# EAGLE board SchoolBot (EAGLE 9.1.0)
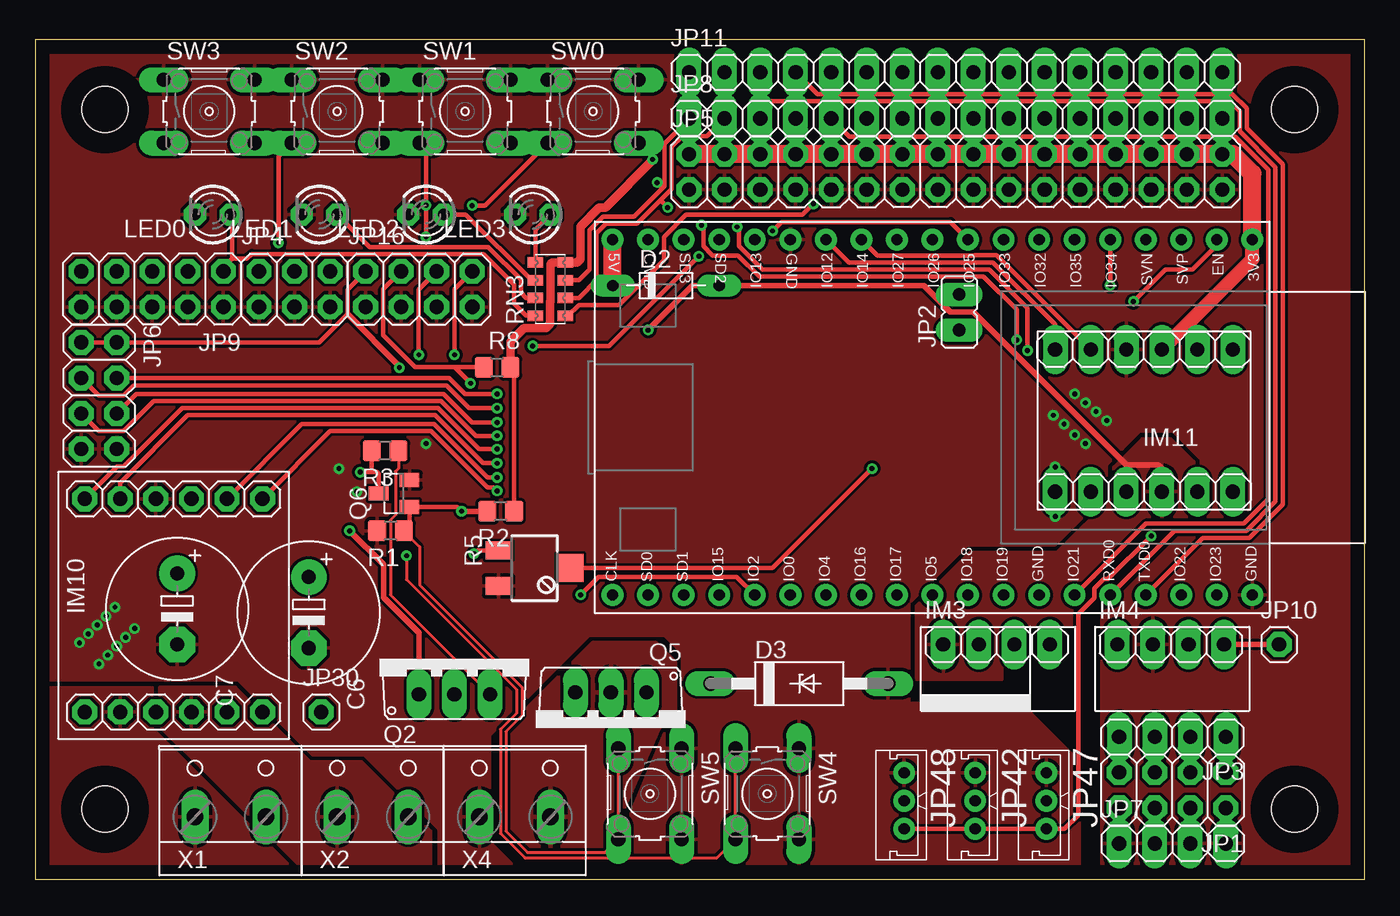
[diagram p0: board, top side]
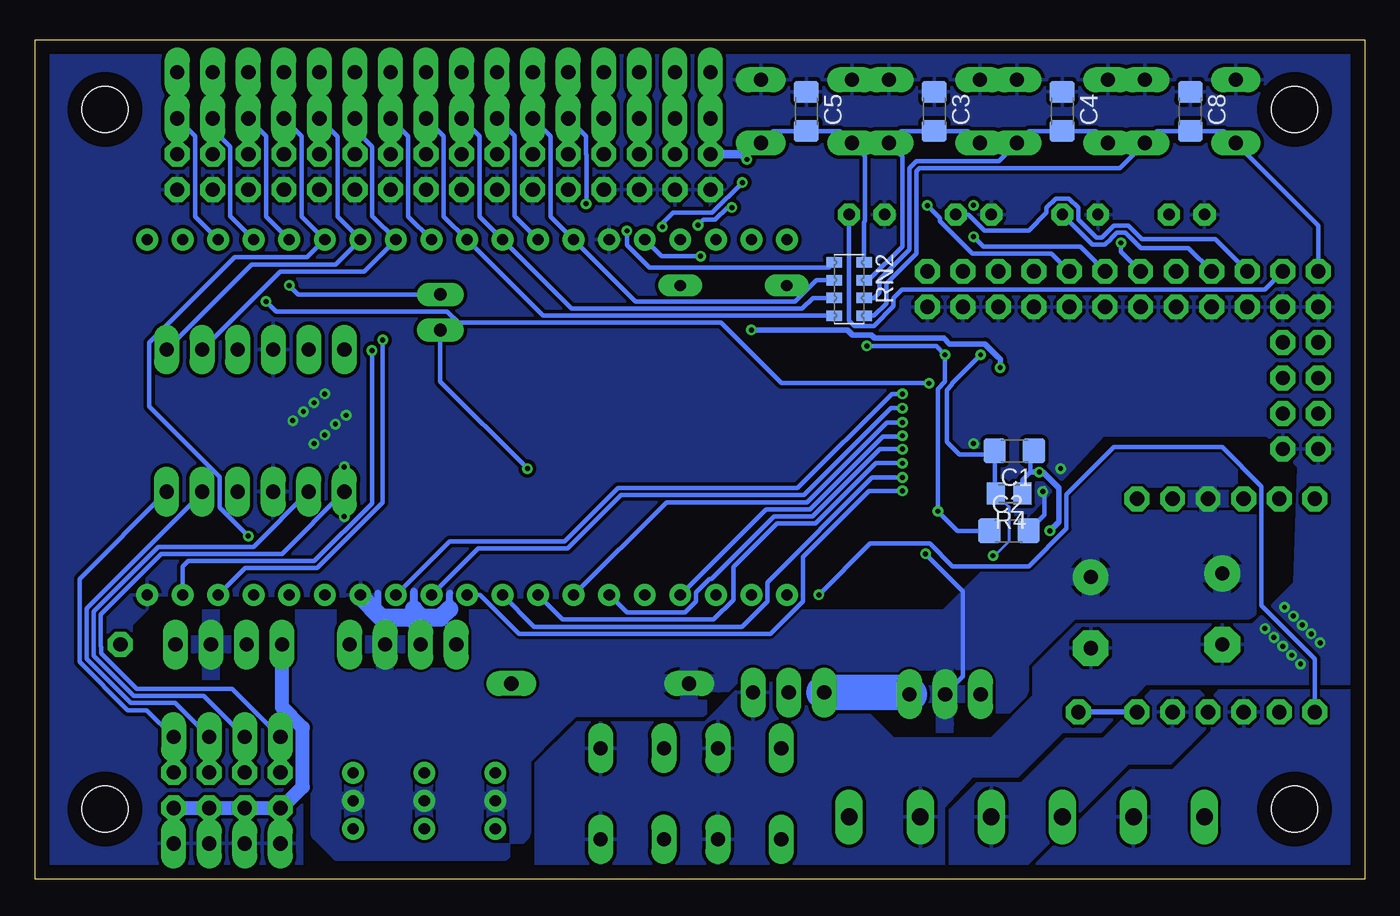
[diagram p1: board, bottom side, seen from below]

Size 95 x 60 mm. Coordinates in mm from the lower left corner, seen from the top.
Outline: 0,0 95,0 95,60 0,60 0,0
Copper layers (1*16): Top 0.035mm / dielectric 1.5mm / Bottom 0.035mm
Design rules "gatema_2layers *": minimum track width 6mil, minimum drill 0.35mm, track to track 6mil, track to pad 6mil, pad to pad 6mil, via to via 6mil, smd to smd 6mil, copper to edge 40mil, drill to drill 6mil, minimum pad ring 15mil, minimum via ring 8mil, stop-mask expansion 4mil, vias tented up to drill 0mil, thermal gap 10mil
Net classes: 0 default: width 0.2 mm, drill 0.35 mm, clearance 0.2 mm
Holes 3.3 mm at 90,5 5,5 5,55 90,55
tRestrict: area 87.4,2.4 to 92.6,7.6; area 2.4,2.4 to 7.6,7.6; area 2.4,52.4 to 7.6,57.6; area 87.4,52.4 to 92.6,57.6

## Footprints (pad centres in the part's own frame; a part is rotated, then mirrored left to right if it is on the bottom)
C1206 = smd 1.6 x 1.8: 1 -1.4,0; 2 1.4,0
E5-10,5 = drill 1.016 pad 2.54: + -2.54,0 | drill 1.016 pad 2.54 octagon: - 2.54,0
D-7.5 = drill 0.813 long: A 3.81,0; C -3.81,0
F126Z12 = drill 1.016 long: A 6.35,0; C -6.35,0
STEPDOWN = drill 1.016 long: EN 1.27,8.89; GND 1.27,3.81; IN 1.27,6.35; OUT 1.27,1.27
DEVKITC = drill 0.8: 1 -12.7,46.99; 2 -12.7,44.45; 3 -12.7,41.91; 4 -12.7,39.37; 5 -12.7,36.83; 6 -12.7,34.29; 7 -12.7,31.75; 8 -12.7,29.21; 9 -12.7,26.67; 10 -12.7,24.13; 11 -12.7,21.59; 12 -12.7,19.05; 13 -12.7,16.51; 14 -12.7,13.97; 15 -12.7,11.43; 16 -12.7,8.89; 17 -12.7,6.35; 18 -12.7,3.81; 19 -12.7,1.27; 20 12.7,1.27; 21 12.7,3.81; 22 12.7,6.35; 23 12.7,8.89; 24 12.7,11.43; 25 12.7,13.97; 26 12.7,16.51; 27 12.7,19.05; 28 12.7,21.59; 29 12.7,24.13; 30 12.7,26.67; 31 12.7,29.21; 32 12.7,31.75; 33 12.7,34.29; 34 12.7,36.83; 35 12.7,39.37; 36 12.7,41.91; 37 12.7,44.45; 38 12.7,46.99
PINHEAD = drill 1.016 octagon: !SLEEP 1.27,13.97; GND 16.51,8.89; IN1 16.51,1.27; IN2 16.51,3.81; IN3 16.51,11.43; IN4 16.51,13.97; OUT1 1.27,11.43; OUT2 1.27,8.89; OUT3 1.27,6.35; OUT4 1.27,3.81; ULT 1.27,1.27; VCC 16.51,6.35
LEVEL_SHIFTER = drill 1.016 long: 1 1.27,1.27; 2 3.81,1.27; 3 6.35,1.27; 4 8.89,1.27; 5 11.43,1.27; 6 13.97,1.27; 7 13.97,11.43; 8 11.43,11.43; 9 8.89,11.43; 10 6.35,11.43; 11 3.81,11.43; 12 1.27,11.43
2X04 = drill 1.016 octagon: 1 -3.81,-1.27; 2 -3.81,1.27; 3 -1.27,-1.27; 4 -1.27,1.27; 5 1.27,-1.27; 6 1.27,1.27; 7 3.81,-1.27; 8 3.81,1.27
JP1 = drill 0.914 long: 1 0,-1.27; 2 0,1.27
1X04 = drill 1.016 long: 1 -3.81,0; 2 -1.27,0; 3 1.27,0; 4 3.81,0
2X03 = drill 1.016 octagon: 1 -2.54,-1.27; 2 -2.54,1.27; 3 0,-1.27; 4 0,1.27; 5 2.54,-1.27; 6 2.54,1.27
2X16 = drill 1.016 octagon: 1 -19.05,-1.27; 2 -19.05,1.27; 3 -16.51,-1.27; 4 -16.51,1.27; 5 -13.97,-1.27; 6 -13.97,1.27; 7 -11.43,-1.27; 8 -11.43,1.27; 9 -8.89,-1.27; 10 -8.89,1.27; 11 -6.35,-1.27; 12 -6.35,1.27; 13 -3.81,-1.27; 14 -3.81,1.27; 15 -1.27,-1.27; 16 -1.27,1.27; 17 1.27,-1.27; 18 1.27,1.27; 19 3.81,-1.27; 20 3.81,1.27; 21 6.35,-1.27; 22 6.35,1.27; 23 8.89,-1.27; 24 8.89,1.27; 25 11.43,-1.27; 26 11.43,1.27; 27 13.97,-1.27; 28 13.97,1.27; 29 16.51,-1.27; 30 16.51,1.27; 31 19.05,-1.27; 32 19.05,1.27
1X16 = drill 1.016 long: 1 -19.05,0; 2 -16.51,0; 3 -13.97,0; 4 -11.43,0; 5 -8.89,0; 6 -6.35,0; 7 -3.81,0; 8 -1.27,0; 9 1.27,0; 10 3.81,0; 11 6.35,0; 12 8.89,0; 13 11.43,0; 14 13.97,0; 15 16.51,0; 16 19.05,0
2X05 = drill 1.016 octagon: 1 -5.08,-1.27; 2 -5.08,1.27; 3 -2.54,-1.27; 4 -2.54,1.27; 5 0,-1.27; 6 0,1.27; 7 2.54,-1.27; 8 2.54,1.27; 9 5.08,-1.27; 10 5.08,1.27
1X01 = drill 1.016 octagon: 1 0,0
292161-3 = drill 0.8: 1 -2,0; 2 0,0; 3 2,0
LED3MM = drill 0.813 octagon: A -1.27,0; K 1.27,0
TO220V = drill 1.016 long: 1 -2.54,-2.54; 2 0,-2.54; 3 2.54,-2.54
SOT23 = smd 1 x 1.4: 1 -0.95,-1.1; 2 0.95,-1.1; 3 0,1.1
R0805 = smd 1.3 x 1.5: 1 -0.95,0; 2 0.95,0
M0805 = smd 1.3 x 1.6: 1 -0.95,0; 2 0.95,0
SM-42/43X = smd 1.3 x 1.9: 1 -1.27,-2.55; 3 1.27,-2.55 | smd 2 x 1.9: 2 0,2.55
EXBS8V = smd 0.75 x 1.1: 1 -1.905,-1.07; 2 -0.635,-1.07; 3 0.635,-1.07; 4 1.905,-1.07; 5 1.905,1.07; 6 0.635,1.07; 7 -0.635,1.07; 8 -1.905,1.07
B3F-10XX = drill 1.016 long: 1 -3.251,2.261; 2 3.251,2.261; 3 -3.251,-2.261; 4 3.251,-2.261
W237-132 = drill 1.194 long: 1 -2.54,-0.635; 2 2.54,-0.635

## Placement (x,y rotation side)
C1  10u  [C1206]  25.02,30.61 180 bottom
C2  10u  [C1206]  25.4,24.89 0 bottom
C3  100n  [C1206]  30.73,54.86 270 bottom
C4  100n  [C1206]  21.59,54.86 270 bottom
C5  100n  [C1206]  39.88,54.86 270 bottom
C6  [E5-10,5]  19.56,19.05 270 top
C7  [E5-10,5]  10.16,19.3 270 top
C8  100n  [C1206]  12.45,54.86 270 bottom
D2  [D-7.5]  45.09,42.42 0 top
D3  [F126Z12]  54.61,13.97 0 top
IM3  STEPDOWN  [STEPDOWN]  63.63,18.03 270 top
IM4  STEPDOWN  [STEPDOWN]  76.07,18.03 270 top
IM6  DEVKITC  [DEVKITC]  40,33 270 top
IM10  DRV8833_BOARD  [PINHEAD]  17.53,10.67 90 top
IM11  LEVEL_SHIFTER  [LEVEL_SHIFTER]  86.87,39.12 180 top
JP1  [2X04]  81.28,6.35 180 top
JP2  [JP1]  66.04,40.51 0 top
JP3  [1X04]  81.28,10.16 180 top
JP4  [2X03]  18.54,42.16 0 top
JP5  [2X16]  65.79,50.55 0 top
JP6  [2X04]  4.57,34.54 270 top
JP7  [1X04]  81.28,2.54 0 top
JP8  [1X16]  65.79,54.36 0 top
JP9  [2X05]  8.38,42.16 180 top
JP10  IM2_EN  [1X01]  88.9,16.76 0 top
JP11  [1X16]  65.79,57.66 0 top
JP16  [2X04]  27.43,42.16 0 top
JP30  IM10_ULT  [1X01]  20.45,11.94 0 top
JP42  292161-3  [292161-3]  67.18,5.59 270 top
JP47  292161-3  [292161-3]  72.26,5.59 270 top
JP48  292161-3  [292161-3]  62.1,5.59 270 top
LED0  RED  [LED3MM]  12.7,47.5 180 top
LED1  GREEN  [LED3MM]  20.32,47.5 180 top
LED2  BLUE  [LED3MM]  27.94,47.5 180 top
LED3  POWER_LED/GREEN  [LED3MM]  35.56,47.5 180 top
Q2  [TO220V]  29.97,15.75 0 top
Q5  [TO220V]  41.15,10.79 180 top
Q6  [SOT23]  25.65,27.56 90 top
R1  2M  [R0805]  25.4,24.89 180 top
R2  10k  [R0805]  33.27,26.29 180 top
R3  100k  [R0805]  25.02,30.61 180 top
R4  2M  [M0805]  25.4,27.56 180 bottom
R5  [SM-42/43X]  35.69,22.23 270 top
R8  10k  [R0805]  33.02,36.58 0 top
RN2  [EXBS8V]  36.83,42.16 270 bottom
RN3  [EXBS8V]  36.83,42.16 90 top
SW0  [B3F-10XX]  39.88,54.86 0 top
SW1  [B3F-10XX]  30.73,54.86 0 top
SW2  [B3F-10XX]  21.59,54.86 0 top
SW3  [B3F-10XX]  12.45,54.86 0 top
SW4  [B3F-10XX]  52.32,6.1 270 top
SW5  [B3F-10XX]  43.94,6.1 270 top
X1  M8  [W237-132]  13.97,5.08 0 top
X2  M8  [W237-132]  24.13,5.08 0 top
X4  POWER_IN  [W237-132]  34.29,5.08 0 top

## Library data of the parts
C1-C5 C8 R1-R4 R8 = rcl_upravena
C6 C7 = rcl; SPICEPREFIX: C
D2 D3 = diode
IM3 IM4 = StepDown
IM6 = esp32
IM10 = DRV8833board
IM11 = LevelShifter
JP1 JP3-JP11 JP16 JP30 = pinhead
JP2 = jumper
JP42 JP47 JP48 = iServo_connector
LED0 LED1-LED3 = led
Q2 Q5 Q6 = transistors
R5 = pot
RN2 RN3 = resistor-dil; OC_FARNELL: unknown; OC_NEWARK: unknown
SW0 SW1-SW5 = switch-omron; MPN: B3F-1000; OC_FARNELL: 176432; OC_NEWARK: 36M3542
X1 X2 X4 = con-wago-508; OC_FARNELL: unknown; OC_NEWARK: unknown

## Nets
+3V3: IM6.1 IM11.3 JP5.2 JP5.4 JP5.6 JP5.8 JP5.10 JP5.12 JP5.14 JP5.16 JP5.18 JP5.20 JP5.22 JP5.24 JP5.26 JP5.28 JP5.30 JP5.32 R2.1 R8.2 RN3.4
+5V: D2.A IM3.OUT IM11.10 JP6.1 JP6.2 JP16.2
+5V_ESP: D2.C IM6.19
BAT1: Q5.2 X4.2
BAT-REF: JP2.1 R5.2
BAT_POL+: Q2.3 Q5.3 R3.1
EN: IM6.2 JP16.4 R8.1
ENC_A1: IM6.26 JP6.6
ENC_A2: IM6.30 JP6.3
ENC_B1: IM6.31 JP6.4
ENC_B2: IM6.23 JP6.5
GND: C2.2 C3.1 C4.1 C5.1 C6.- C7.- C8.1 D3.A IM3.GND IM4.GND IM6.14 IM6.32 IM6.38 IM10.GND IM11.4 IM11.9 JP4.1 JP4.3 JP4.5 JP5.1 JP5.3 JP5.5 JP5.7 JP5.9 JP5.11 JP5.13 JP5.15 JP5.17 JP5.19 JP5.21 JP5.23 JP5.25 JP5.27 JP5.29 JP5.31 JP6.7 JP6.8 JP7.1 JP7.2 JP7.3 JP7.4 JP9.2 JP9.4 JP9.6 JP9.8 JP9.10 JP16.1 JP16.3 JP16.5 JP16.7 JP42.1 JP47.1 JP48.1 LED0.K LED1.K LED2.K LED3.K Q5.1 Q6.2 R1.2 R5.3 SW0.1 SW0.2 SW1.1 SW1.2 SW2.1 SW2.2 SW3.1 SW3.2 SW4.1 SW4.2 SW5.1 SW5.2 X4.1
GPIO12: IM6.13 IM11.6 JP8.6 JP11.6 RN2.2
GPIO13-5V: IM11.11 JP1.3 JP3.2
GPIO14: IM6.12 IM11.5 JP8.7 JP11.7
GPIO14-5V: IM11.12 JP1.1 JP3.1
GPIO21: IM6.33 JP8.5 JP11.5 RN3.1
GPIO22: IM6.36 JP8.2 JP11.2 RN3.2
GPIO23: IM6.37 JP8.1 JP11.1 RN3.3
GPIO25: IM6.9 JP8.10 JP11.10 RN2.1
GPIO26: IM6.10 JP8.9 JP11.9 RN2.4
GPIO27: IM6.11 JP8.8 JP11.8 RN2.3
GPIO32: IM6.7 IM11.1 JP8.12 JP11.12
GPIO32_5V: IM11.7 JP1.7 JP3.4
GPIO33: IM6.8 IM11.2 JP8.11 JP11.11
GPIO33_5V: IM11.8 JP1.5 JP3.3
GPIO34: IM6.5 JP2.2 JP8.14 JP11.14
GPIO35: IM6.6 JP8.13 JP11.13 JP42.3 JP47.3 JP48.3
GPIO36: IM6.3 JP8.16 JP11.16
GPIO39: IM6.4 JP8.15 JP11.15
IO1: IM6.35 JP8.4 JP11.4
IO3: IM6.34 JP8.3 JP11.3
IO9_NC: IM6.16
IO9_NC1: IM6.20
IO9_NC2: IM3.EN
IO10_NC: IM6.17
IO10_NC1: IM6.21
IO11_NC: IM6.18
IO11_NC1: IM6.22
LED0: JP9.1 LED0.A RN3.8
LED1: JP9.3 LED1.A RN3.7
LED2: JP9.5 LED2.A RN3.6
LED3: JP9.7 LED3.A RN3.5
M1A: IM10.OUT1 X1.1
M1B: IM10.OUT2 X1.2
M2A: IM10.OUT3 X2.1
M2B: IM10.OUT4 X2.2
N$1: IM10.ULT JP30.1
OFF: C2.1 IM6.15 JP16.8 Q6.1 R1.1 R2.2 SW5.3 SW5.4
ON: C1.2 JP16.6 R4.2 SW4.3 SW4.4
PWM0: IM6.29 IM10.IN1
PWM1: IM6.28 IM10.IN2
PWM2: IM6.27 IM10.IN3
PWM3: IM6.25 IM10.IN4
SERVO_STEPDOWN_5V: IM4.OUT JP1.2 JP1.4 JP1.6 JP1.8
SLEEP: IM6.24 IM10.!SLEEP
START_GATE1: C1.1 Q2.1 Q6.3 R3.2 R4.1
STEP2_EN1: IM4.EN JP10.1
SW0: C5.2 JP4.6 RN2.8 SW0.3 SW0.4
SW1: C3.2 JP4.4 RN2.7 SW1.3 SW1.4
SW2: C4.2 JP4.2 RN2.6 SW2.3 SW2.4
SW3: C8.2 JP9.9 RN2.5 SW3.3 SW3.4
VCC: C6.+ C7.+ D3.C IM3.IN IM4.IN IM10.VCC JP42.2 JP47.2 JP48.2 Q2.2 R5.1

## Tracks (layer width: path | path; a pad name or v marks a point on that pad's centre or on a via)
+3V3  (via drill 0.35)
  Top 0.305: R2.1 34.22,36.32 R8.2
  Top 0.61: R8.2 33.97,38.41 34.93,39.38 36.52,39.38 36.81,39.67 36.81,41.26 36.83,41.27 36.83,43.94 36.96,44.07 RN3.4 38.72,44.07 38.97,44.32 38.97,46.65 40.32,47.99 40.76,47.99 44.13,51.36 v44.13,51.44
  Top 1.016: IM11.3 86.99,44.32 IM6.1
  Top 1.27: IM6.1 86.99,50.42 85.6,51.82 JP5.32 JP5.30 JP5.28 JP5.26 JP5.24 JP5.22 JP5.20 JP5.18 JP5.16 JP5.14 JP5.12 JP5.10 JP5.8 JP5.6 JP5.4 JP5.2
  Bottom 0.61: v44.13,51.44 44.51,51.82 JP5.2
+5V  (via drill 0.35)
  Top 0.305: JP16.2 22.32,42.13 22.32,40.38 20.3,38.35 JP6.2 JP6.1
  Top 0.406: IM11.10 80.52,29.34 80.26,29.59 77.98,29.59 67.06,40.51 65.41,40.51 63.5,42.42 D2.A 46.99,42.42 v43.81,39.24 | 22.32,40.38 26.04,36.67 v26.04,36.55
  Bottom 0.406: v43.81,39.24 36.95,39.24 36.59,38.88 35.24,38.88 35.01,38.66 30.06,38.66 29.65,38.25 27.11,38.25 26.18,37.32 | 26.18,37.32 26.12,37.26 | 26.18,37.32 26.04,37.17 v26.04,36.55
  pour Top: 79.12,31.5 81.15,31.5 82.8,29.84 82.8,26.16 74.68,18.03 69.09,18.03 69.09,14.22 62.99,14.22 62.99,19.56 66.8,23.37 73.03,23.37 77.09,27.43 77.09,29.46
+5V_ESP
  Top 1.27: D2.C IM6.19
BAT1
  pour Top: 33.02,7.62 33.02,2.92 35.18,0.76 40.14,0.76 44.56,10.78 45.72,11.94 45.72,15.49 44.32,16.89 42.93,16.89 39.88,16.89 38.61,15.62 33.02,10.03
BAT-REF  (via drill 0.35)
  Top 0.305: R5.2 52.7,22.23 v59.82,29.34
  Bottom 0.305: v59.82,29.34 66.04,35.56 JP2.1
BAT_POL+
  Top 0.2: R3.1 25.97,29.35 25.75,29.13 25.75,26.01 25.4,25.65 25.4,20.32 Q2.3
  Bottom 2.54: Q5.3 32.64,13.34 Q2.3
EN  (via drill 0.35)
  Top 0.305: JP16.4 24.89,42.16 24.89,38.86 27.18,36.58 29.46,36.58 29.97,36.58 | v78.49,41.27 80.77,43.56 82.69,43.56 84.45,45.32 IM6.2 | 29.97,36.58 v31.11,35.43 | 29.97,36.58 R8.1
  Bottom 0.305: v31.11,35.43 41.66,35.43 45.98,39.75 64.74,39.75 65.55,40.56 77.77,40.56 v78.49,41.27
ENC_A1  (via drill 0.35)
  Top 0.305: v33.02,32.64 31.24,32.64 29.21,34.67 7.24,34.67 JP6.6
  Bottom 0.305: IM6.26 49.89,26.92 39.85,26.92 34.13,32.64 v33.02,32.64
ENC_A2  (via drill 0.35)
  Top 0.305: JP6.3 4.54,34.57 6.36,34.57 7.07,35.28 29.4,35.28 31.02,33.66 v33.02,33.66
  Bottom 0.305: IM6.30 63.34,23.62 56.94,23.62 53.13,27.43 40.05,27.43 33.83,33.66 v33.02,33.66
ENC_B1  (via drill 0.35)
  Top 0.305: JP6.4 29.59,35.81 30.73,34.67 v33.02,34.67
  Bottom 0.305: IM6.31 65.38,24.13 57.15,24.13 53.34,27.94 40.51,27.94 33.78,34.67 v33.02,34.67
ENC_B2  (via drill 0.35)
  Top 0.305: v33.02,31.68 32.99,31.65 31.51,31.65 29,34.16 8.49,34.16 6.36,32.03 4.54,32.03 JP6.5
  Bottom 0.305: IM6.23 42.77,26.42 39.64,26.42 34.42,31.64 33.06,31.64 v33.02,31.68
GND  (via drill 0.35)
  Bottom 0.305: C2.2 22.86,26.03 22.86,27.94
  Bottom 0.508: 67.94,19.29 67.94,20.57 67.91,20.53 67.91,19.79 67.18,19.07 66.16,19.07 65.94,19.29 | 65.94,19.29 65.4,19.29 | 65.94,19.29 65.36,19.86 65.36,20.45 | 70.23,18.67 70.48,18.92 70.48,20.45
  Bottom 1.27: 67.34,16.86 IM3.GND 67.44,18.03 67.88,18.48 | 67.88,18.48 68.07,18.67 70.23,18.67 71.75,20.19 IM6.32 | 65.4,19.29 66,18.68 67.68,18.68 67.88,18.48 | 67.88,18.48 67.88,19.23 67.94,19.29
  other vias: 72.9,25.91 72.9,29.46 72.77,33.15 73.53,32.51 74.3,31.75 75.06,31.11 76.58,32.77 75.82,33.4 75.06,34.04 74.3,34.67 21.72,29.34 22.99,27.69 27.94,31.11 4.57,15.37 5.21,16 5.84,16.64 6.48,17.27 7.11,17.91 3.17,16.89 3.81,17.53 4.45,18.16 5.08,18.8 5.71,19.43
  pour Bottom (isolate 0.254): -2.54,60.96 -2.54,13.97 15.62,13.97 18.83,10.54 21.59,10.54 24.77,7.37 28.01,7.37 30.1,5.14 30.1,0.89 31.37,-0.51 58.29,-0.51 59.18,0.38 59.18,8.26 56.26,11.18 47.12,11.18 44.32,13.97 37.59,13.97 33.66,10.03 26.67,10.03 23.62,13.08 23.62,13.97 23.62,14.48 23.62,15.11 20.57,18.16 8,18.16 5,21.16 4.7,29.46 6.99,31.75 18.67,31.75 23.75,26.29 30.1,19.94 85.98,20.32 88.14,18.16 88.14,15.75 88.14,15.37 86.36,13.59 80.14,13.59 75.95,9.4 75.95,2.79 75.95,0.03 76.83,-1 96.9,-1 96.9,18.29 96.9,60.96
  pour Top: 28.83,3.56 28.83,-0.76 29.08,-1.02 29.46,-1.4 36.58,-1.4 32.51,2.67 32.51,10.29 39.62,17.4 44.96,17.4 46.23,16.13 46.23,11.36 45.9,11.36 44.96,10.41 42.55,4.65 42.55,-1.52 73.41,-1.52 74.68,-0.25 74.68,8.38 70.48,12.57 62.48,12.57 62.48,19.68 66.67,23.88 72.9,23.88 76.58,27.56 76.58,29.59 78.99,32 81.28,32 83.31,29.97 83.31,26.04 76.71,19.43 76.2,18.92 76.2,0 77.72,-1.52 96.52,-1.52 96.52,60.96 0,60.96 -2.54,60.96 -2.54,14.22 14.48,14.22 19.81,8.89 23.5,8.89
GPIO12
  Top 0.305: IM6.13 58.15,44.06 68.46,44.06 72.9,39.62 IM11.6
  Bottom 0.305: JP11.6 JP8.6 58.17,53.09 58.17,47.36 IM6.13 52.09,41.27 40.69,41.27 39.17,42.8 RN2.2
GPIO13-5V
  Bottom 0.305: IM11.11 83.06,27.59 91.31,19.34 91.31,18.17 91.31,18.16 91.31,15.73 88.15,12.58 84.97,12.58 JP3.2 JP1.3
GPIO14
  Top 0.305: IM11.5 68.71,44.58 67.15,44.58 67.14,44.57 60.18,44.57 IM6.12
  Bottom 0.305: JP11.7 JP8.7 60.73,53.12 60.73,47.38 IM6.12
GPIO14-5V
  Bottom 0.305: IM11.12 91.82,21.47 91.82,15.53 88.36,12.07 87,12.07 JP3.1 JP1.1
GPIO21  (via drill 0.35)
  Top 0.305: RN3.1 38.1,40.26 38.87,41.02 41.75,41.02 44.94,44.22 44.94,45.9 46.52,47.47 54.83,47.47 v55.63,48.26 | JP8.5 58.2,53.06 85.75,53.06 88.12,50.69 88.12,45.23 88.14,45.21 88.14,27.18 86.36,25.4 79.38,25.4 74.29,20.32 IM6.33
  Bottom 0.305: JP11.5 JP8.5 55.63,53.09 55.63,51.82 55.6,51.79 55.6,48.29 v55.63,48.26
GPIO22  (via drill 0.35)
  Top 0.305: RN3.2 38.86,41.53 40.13,42.8 40.13,46.16 40.8,46.83 43.02,46.83 44.77,48.58 | 44.77,48.58 45.49,49.3 45.49,52.33 46.22,53.06 47.6,53.06 47.62,53.09 48.01,53.09 JP8.2 JP11.2 | v47.62,46.74 47.76,46.6 47.76,45.23 48.42,44.57 50.25,44.57 51.76,43.05 67.78,43.05 70.15,40.69 v70.15,38.53 | v45.2,48 44.77,48.43 44.77,48.58
  Bottom 0.305: IM6.36 79.98,22.23 74.83,22.23 70.15,26.91 v70.15,38.53 | v45.2,48 45.52,48 46.4,47.12 47.24,47.12 v47.62,46.74
GPIO23  (via drill 0.35)
  Top 0.305: 44.99,49.51 44.99,52.54 46.74,54.29 JP8.1 JP11.1 | 44.99,49.51 42.81,47.34 40.59,47.34 39.63,46.37 39.63,43.56 38.86,42.8 RN3.3 | v50.16,46.61 50.3,46.48 50.3,45.23 51.97,43.56 68.19,43.56 70.92,40.82 v70.92,37.77 | 44.99,49.51 44.72,49.51 v44.45,49.78
  Bottom 0.305: IM6.37 84.45,22.36 84.07,22.74 75.04,22.74 70.92,26.85 v70.92,37.77 | v44.45,49.78 46.61,47.62 49.4,47.62 50.16,46.86 v50.16,46.61
GPIO25  (via drill 0.35)
  Top 0.305: v52.7,46.32 53.34,46.96 65.41,46.96 IM6.9
  Bottom 0.305: IM6.9 68.33,47.36 68.33,53.09 JP8.10 JP11.10 | v52.7,46.32 52.7,45.31 51.09,43.69 38.28,43.69 RN2.1
GPIO26
  Bottom 0.305: JP11.9 JP8.9 65.79,53.09 65.79,47.36 IM6.10 58.69,40.26 RN2.4
GPIO27
  Bottom 0.305: JP11.8 JP8.8 63.25,53.09 63.25,47.36 IM6.11 56.66,40.77 40.19,40.77 39.42,41.53 RN2.3
GPIO32
  Bottom 0.305: JP11.12 JP8.12 73.38,53.06 73.38,47.33 IM6.7 73.52,43.93 79.51,43.93 IM11.1
GPIO32_5V
  Bottom 0.305: IM11.7 77.34,23.24 85.98,23.24 90.3,18.92 90.3,16.64 90.27,16.61 90.27,16.12 87.73,13.59 80.9,13.59 JP3.4 JP1.7
GPIO33
  Bottom 0.305: JP11.11 JP8.11 72.14,53.57 70.89,52.33 70.89,47.38 IM6.8 71.48,43.43 77.48,43.43 IM11.2
GPIO33_5V
  Bottom 0.305: IM11.8 79.38,23.75 86.19,23.75 90.8,19.13 90.8,15.94 87.94,13.08 82.93,13.08 JP3.3 JP1.5
GPIO34  (via drill 0.35)
  Top 0.305: v76.83,42.42 IM6.5
  Bottom 0.305: IM6.5 78.49,47.36 78.49,53.09 JP8.14 JP11.14 | JP2.2 76.2,41.78 v76.83,42.42
GPIO35  (via drill 0.35)
  Top 0.305: JP48.3 JP42.3 JP47.3 73.56,3.59 74.55,4.57 74.55,18.96 75.7,20.1 75.7,20.77 76.36,21.43 76.68,21.43 v79.76,24.51
  Bottom 0.305: JP11.13 JP8.13 75.95,53.09 75.95,47.36 IM6.6 75.54,44.45 80.75,44.45 86.84,38.36 86.84,33.78 81.82,28.75 81.82,26.57 v79.76,24.51
GPIO36
  Bottom 0.305: IM6.3 83.57,47.36 83.57,53.09 JP8.16 JP11.16
GPIO39
  Bottom 0.305: JP11.15 JP8.15 82.3,53.57 81.06,52.33 81.06,47.38 IM6.4
IO1
  Top 0.305: JP11.4 55.91,56.1 85.56,56.1 86.58,55.08 86.58,53.66 89.15,51.09 89.15,26.76 86.78,24.39 83.46,24.39 IM6.35
  Bottom 0.305: JP8.4 JP11.4
IO3
  Top 0.305: JP8.3 51.82,55.5 | 51.82,55.5 JP11.3 | IM6.34 81.42,24.89 86.57,24.89 88.64,26.97 88.64,50.88 86.08,53.45 86.08,54.87 85.35,55.6 51.91,55.6 51.82,55.5
LED0
  Top 0.305: RN3.8 35.1,40.26 34.23,41.13 34.23,42.48 33.09,43.63 32.04,44.67 15.49,44.67 15.14,44.33 14.09,44.33 | JP9.1 13.46,43.69 14.09,44.33 | 14.09,44.33 14.09,47.37 LED0.A
LED1
  Top 0.305: RN3.7 35.1,41.53 34.73,41.9 34.73,42.83 32.38,45.18 23.91,45.18 LED1.A
  Bottom 0.305: JP9.3 12.57,45.09 15.98,45.09 17.1,46.2 17.7,46.2 18.13,45.77 18.13,45.75 18.54,45.34 19.43,45.34 LED1.A
LED2
  Top 0.305: LED2.A 30.78,47.5 35.48,42.8 RN3.6
  Bottom 0.305: JP9.5 10.67,45.72 15.91,45.72 16.89,46.7 17.91,46.7 18.77,45.84 19.18,45.84 20.45,47.12 20.45,47.97 21.12,48.64 22.06,48.64 22.73,47.97 22.73,47.62 24,46.35 27.17,46.35 28.31,47.5 LED2.A
LED3
  Top 0.305: RN3.5 35.76,46.43 LED3.A
  Bottom 0.305: LED3.A 36.83,39.91 36.46,39.53 35.06,39.53 33.66,40.93 33.66,41.52 33.05,42.13 7.14,42.13 JP9.7
M1A
  pour Top: 8.38,13.72 8.38,10.79 19.94,-0.76 0.13,-0.76 -1.02,0.38 -1.02,13.08 -0.38,13.72
M1B
  pour Bottom: 10.92,12.95 10.92,10.54 12.06,9.4 13.72,7.75 16.76,7.75 25.15,-0.64 0.25,-0.64 -0.76,0.38 -0.76,13.21 -0.51,13.46 10.41,13.46
M2A
  pour Top: 8.89,13.72 8.89,10.92 11.43,8.38 20.57,-0.76 27.18,-0.76 28.32,0.38 28.32,3.43 23.37,8.38 19.68,8.38 14.35,13.72
M2B
  pour Bottom: 11.43,13.08 11.43,10.67 12.45,9.65 13.84,8.26 16.89,8.26 25.65,-0.51 28.07,-0.51 29.59,1.02 29.59,4.95 27.69,6.86 24.51,6.86 22.35,9.02 21.34,10.03 18.67,10.03 15.24,13.46 11.81,13.46
N$1
  Bottom 0.406: IM10.ULT JP30.1
OFF  (via drill 0.35)
  Top 0.2: SW5.3 SW5.4 40.74,1.91 35.18,1.91 33.66,3.43 33.66,10.54 34.8,11.68 34.8,13.72 27.49,21.02 27.49,23.75 R1.1
  Top 0.305: R1.1 26.75,25.3 Q6.1 30.16,26.61 v30.48,26.29 | JP16.8 29.97,42.16 v29.97,37.47 | v47.44,44.52 41.02,38.1 v35.56,38.1
  Top 0.406: v30.48,26.29 R2.2
  Bottom 0.305: C2.1 27.94,24.89 | 27.94,24.89 | IM6.15 50.25,44.52 v47.44,44.52 | v35.56,38.1 30.61,38.1 v29.97,37.47 29.97,35.54 30.48,35.03 v30.48,26.29 29.08,24.89 27.94,24.89
ON  (via drill 0.35)
  Top 0.2: v26.54,23.11 26.54,21.41 34.4,13.55 34.4,11.85 33.26,10.71 33.26,3.26 35.01,1.5 48.72,1.5 SW4.4 SW4.3
  Top 0.305: JP16.6 27.4,42.13 27.4,37.49 v27.43,37.47
  Bottom 0.2: R4.2 25.4,26.61 25.4,24.13 26.42,23.11 v26.54,23.11
  Bottom 0.305: R4.2 26.42,27.63 C1.2 26.67,30.35 28.96,30.35 29.84,31.24 29.84,34.96 29.47,35.33 29.47,35.43 v27.43,37.47
PWM0  (via drill 0.35)
  Top 0.305: v33.02,27.75 32.79,27.97 32.34,27.97 28.31,32 21.08,32 IM10.IN1
  Bottom 0.305: 64.13,20.59 IM6.29 63.19,20.3 60.42,17.53 42.44,17.53 40.14,19.83 40.14,23.03 35.42,27.75 v33.02,27.75
PWM1  (via drill 0.35)
  Top 0.305: IM10.IN2 19.05,32.51 28.51,32.51 32.32,28.7 v33.02,28.7
  Bottom 0.305: v33.02,28.7 35.18,28.7 42.68,21.2 42.68,19.83 44.47,18.04 59.33,18.04 IM6.28
PWM2  (via drill 0.35)
  Top 0.305: IM10.IN3 6.1,28.32 10.93,33.15 28.59,33.15 32.02,29.72 v33.02,29.72
  Bottom 0.305: v33.02,29.72 34.91,29.72 39.22,25.41 41.98,25.41 45.09,22.31 45.09,19.96 46.51,18.54 57.29,18.54 IM6.27
PWM3  (via drill 0.35)
  Top 0.305: IM10.IN4 5.87,29.49 6.36,29.49 10.52,33.66 28.8,33.66 31.73,30.73 v33.02,30.73
  Bottom 0.305: v33.02,30.73 34.62,30.73 39.43,25.91 42.19,25.91 46.67,21.43 46.82,21.43 47.76,20.5 47.76,19.83 48.54,19.05 52.7,19.05 53.95,20.3 IM6.25
SERVO_STEPDOWN_5V
  Bottom 1.016: JP1.2 JP1.4 JP1.6 JP1.8 77.37,5.08 75.87,6.58 75.87,10.82 77.34,12.29 IM4.OUT
SLEEP  (via drill 0.35)
  Top 0.305: IM6.24 50.14,21.59 41.15,21.59 40.26,21.59 v38.99,20.32
  Bottom 0.305: v38.99,20.32 35.34,23.97 31.07,23.97 29.45,22.35 23.99,22.35 21.29,25.05 21.29,27.48 17.91,30.86 10.16,30.86 7.37,28.07 7.37,19.56 3.56,15.75 IM10.!SLEEP
START_GATE1  (via drill 0.35)
  Top 0.305: 24.07,29.08 R3.2 | 24.07,29.08 24.45,29.08 24.55,28.98 Q6.3 | v23.24,29.08 24.07,29.08
  Top 0.406: Q2.1 27.43,17.58 24.9,20.11 24.9,22.47 v22.48,24.89
  Bottom 0.305: C1.1 23.88,30.35 23.88,29.08 24.45,28.51 R4.1
  Bottom 0.406: v22.48,24.89 21.84,25.53 21.84,27.94 22.99,29.08 v23.24,29.08 23.88,29.08
STEP2_EN1
  Top 0.406: IM4.EN JP10.1
SW0  (via drill 0.35)
  Top 0.305: v31.24,48.13 32.16,48.13 SW0.3
  Bottom 0.305: RN2.8 35.76,46.96 35.69,47.03 35.69,51.67 SW0.3 37.49,53.46 C5.2 42.27,53.46 SW0.4 | v31.24,48.13 30.35,47.24 30.35,47.03 28.03,44.7 22.37,44.7 21.1,43.43 JP4.6
SW1  (via drill 0.35)
  Top 0.305: SW1.3 27.94,52.15 v27.94,48.16 v27.94,45.91
  Bottom 0.305: RN2.7 35.43,42.8 33.02,45.21 33.02,51.64 SW1.4 33.12,53.46 C3.2 28.34,53.46 SW1.3 | JP4.4 20.32,45.21 27.24,45.21 v27.94,45.91
SW2  (via drill 0.35)
  Top 0.305: v17.4,45.47 17.4,51.66 SW2.3
  Bottom 0.305: RN2.6 35.05,41.53 34.67,41.91 34.67,42.85 32.52,45 32.52,45.72 32.52,50.8 32.01,51.31 26.14,51.31 SW2.4 23.98,53.46 C4.2 19.2,53.46 SW2.3 | JP4.2 17.4,44.83 v17.4,45.47
SW3
  Bottom 0.305: RN2.5 35.05,40.26 34.17,41.15 34.17,42.55 32.01,44.7 32.01,50.59 31.8,50.8 17.5,50.8 SW3.4 14.84,53.46 C8.2 10.05,53.46 SW3.3 3.3,46.71 JP9.9
VCC  (via drill 0.35)
  Top 0.305: R5.1 31.62,23.5 v31.37,23.24
  Bottom 0.305: v31.37,23.24 28.7,20.57 28.7,14.48 Q2.2
  pour Bottom: 7.62,30.48 5.97,28.83 5.97,22.35 5.97,21.59 8.38,19.18 20.95,19.18 23.62,16.51 24.64,15.49 24.64,13.46 27.05,11.05 31.11,11.05 33.15,11.05 36.32,14.22 37.08,14.99 41.02,14.99 44.7,14.99 47.5,12.19 56.64,12.19 58.04,10.79 60.2,8.64 60.2,3.3 61.59,1.91 73.28,1.91 74.68,3.3 74.68,9.78 79.76,14.86 85.85,14.86 86.87,15.88 86.87,17.65 85.85,18.67 38.86,18.67 29.84,18.67 19.68,28.83 18.03,30.48